# Altium PCB PCB.PcbDoc
Units mm, origin at the board's own origin, x right, y up, seen from the top; angles counter-clockwise.
Board outline 113.2 x 113.2 mm, 4 copper layers (Top Layer, Mid-Layer 1, Mid-Layer 2, Bottom Layer), stack 1.545 mm thick; 17 components, 5 nets, 450 pads, 0 vias.
Unrouted connection lines stored in the file: 39.
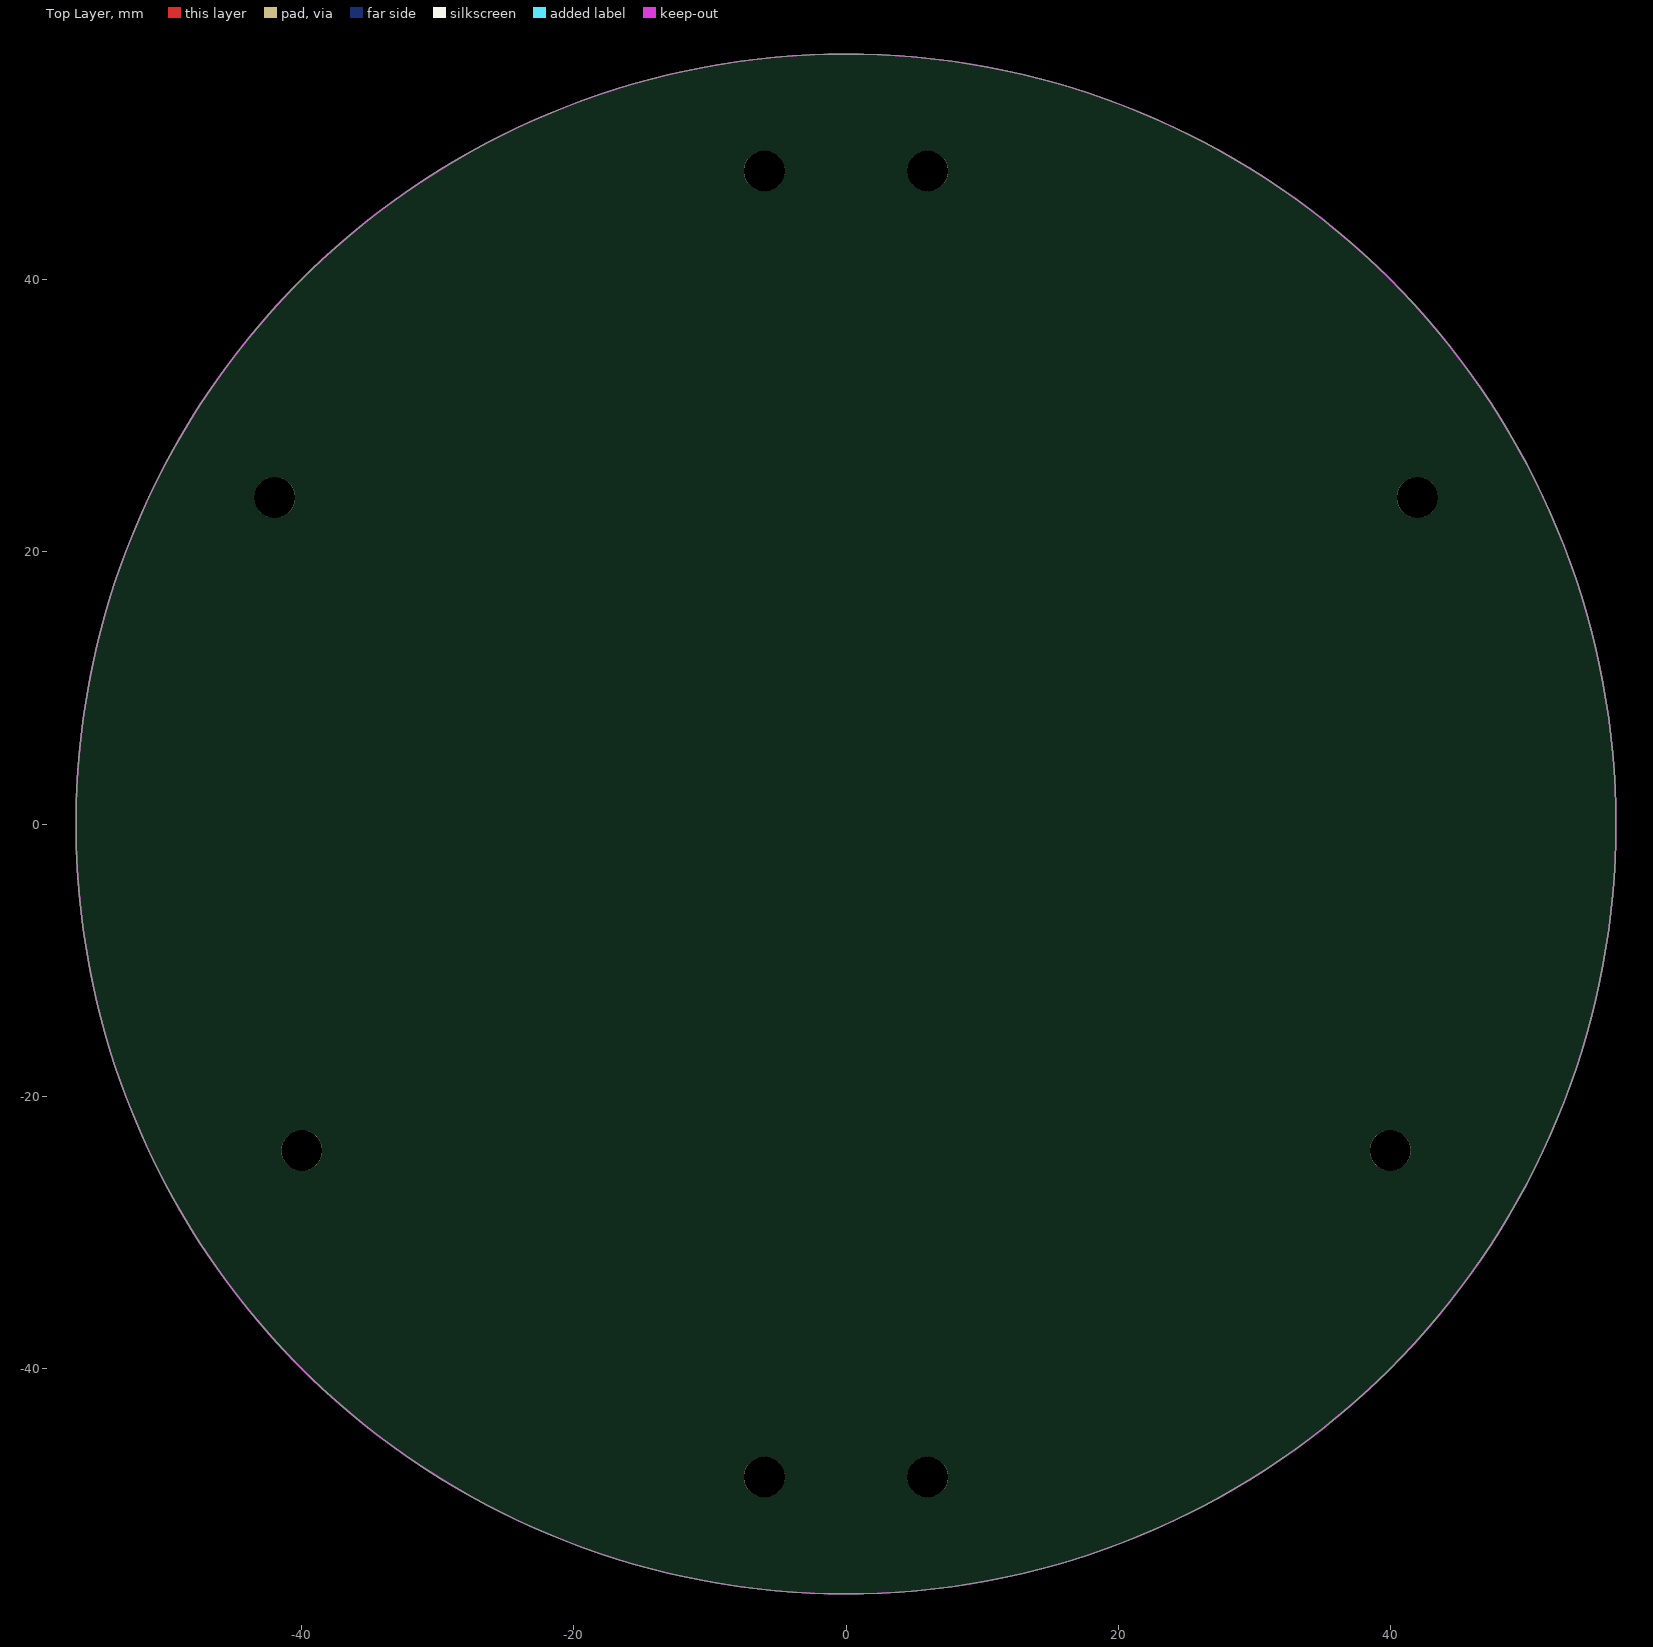
[diagram p0: Top Layer view]
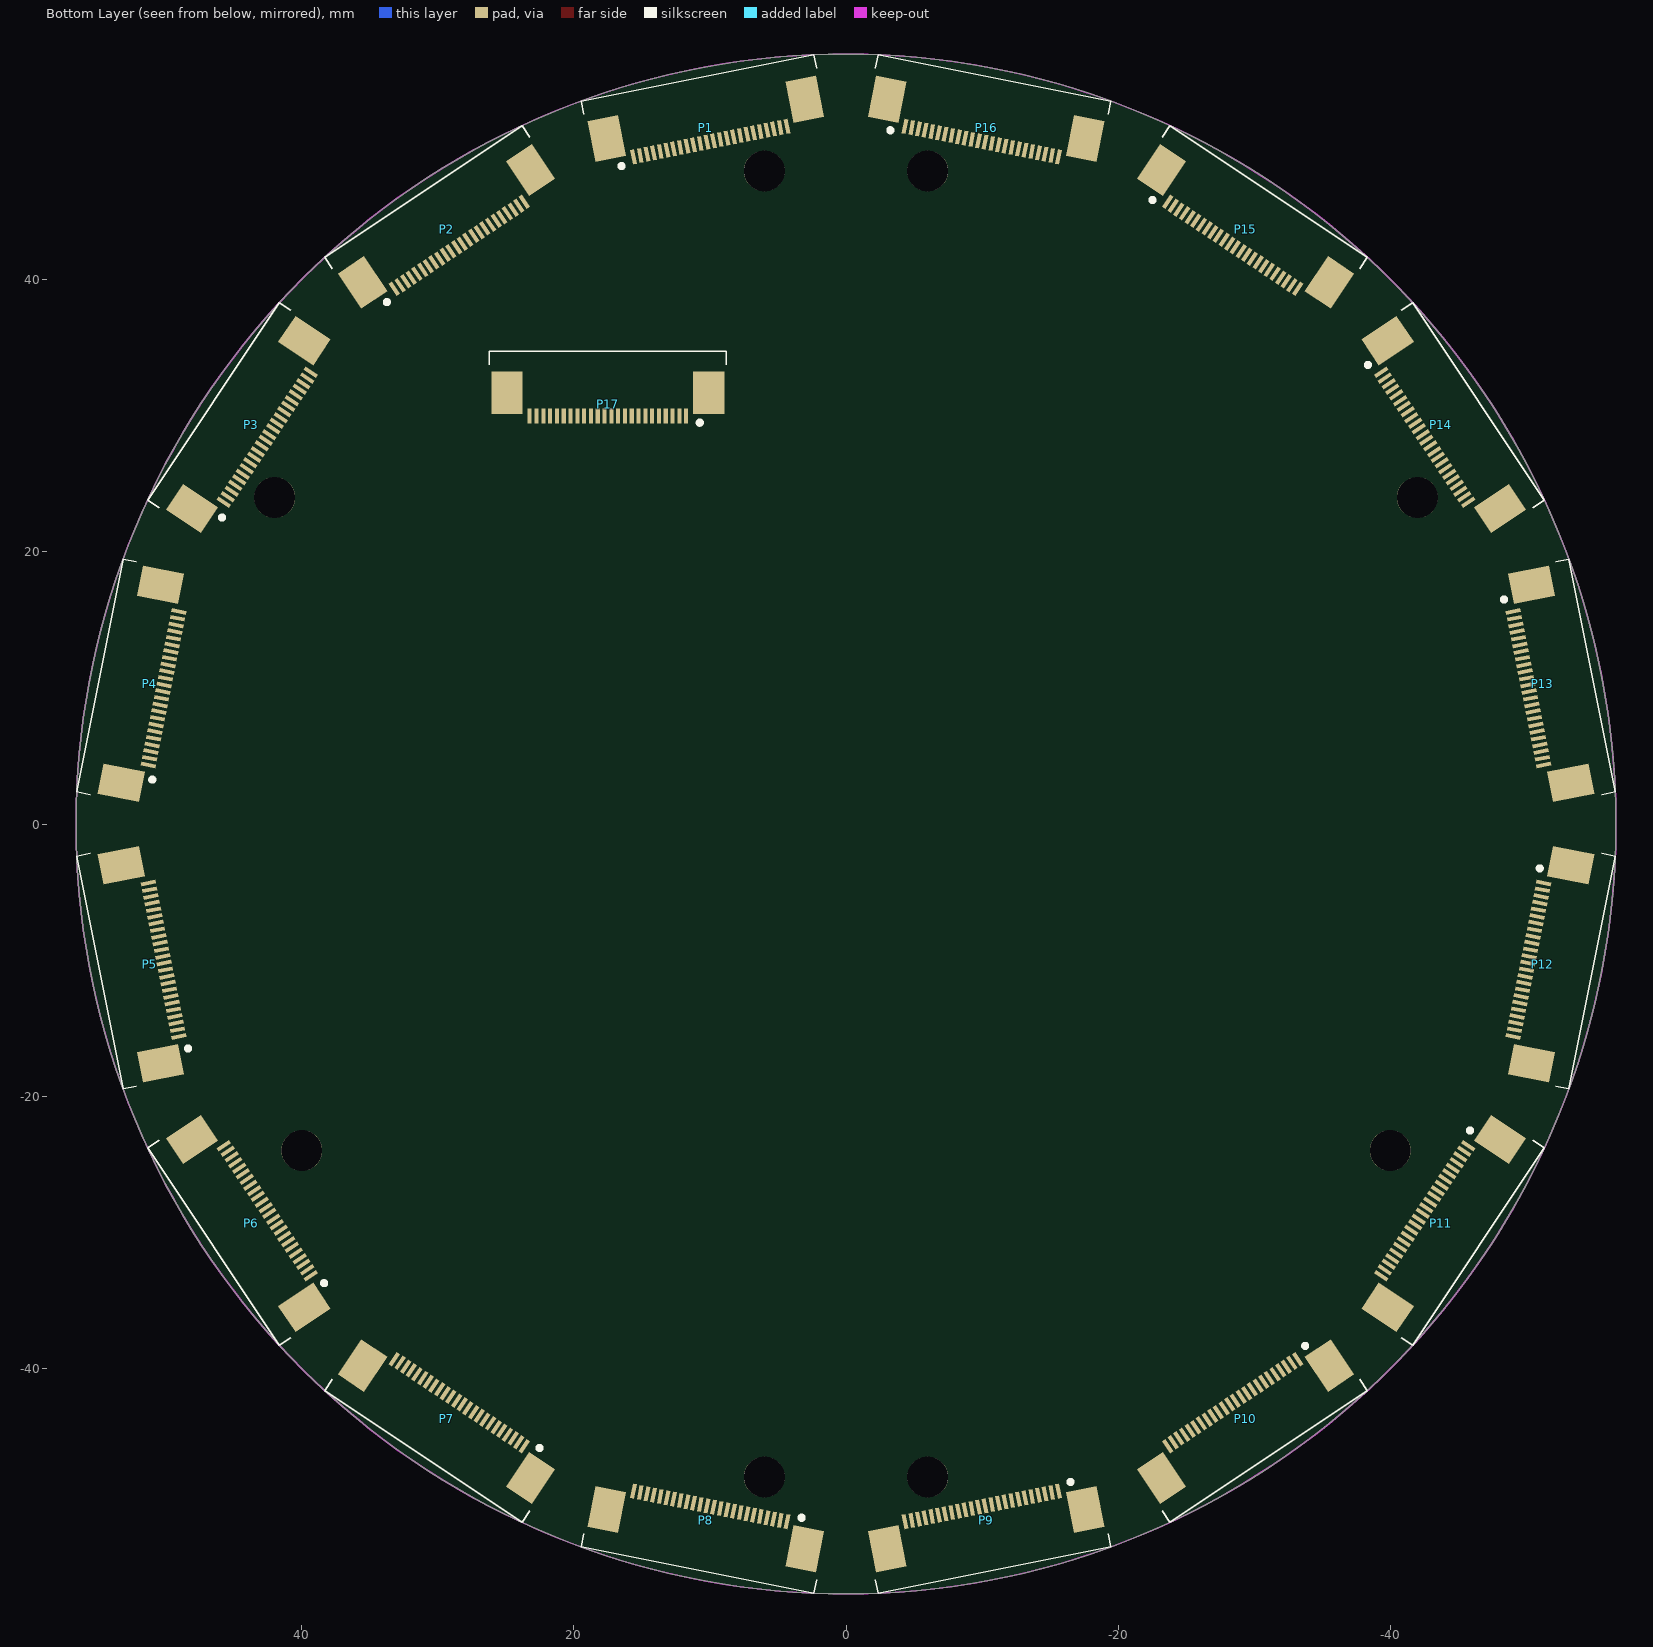
[diagram p1: Bottom Layer view, seen from below]

## Layer stack, top to bottom
Top Solder: solder mask 0.016, Solder Resist, Dk 3.5
Top Layer: signal copper 0.035
Dielectric1: prepreg 0.12, FR-4, Dk 4.5
Mid-Layer 1: signal copper 0.0175
Dielectric2: core 1.2, FR-4, Dk 4.6
Mid-Layer 2: signal copper 0.0175
Dielectric3: prepreg 0.12, FR-4, Dk 4.5
Bottom Layer: signal copper 0.035
Bottom Solder: solder mask 0.016, Solder Resist, Dk 3.5

## Board outline
-56.6,0 ccw(c0,0) 0,-56.6 ccw(c0,0) 56.6,0 ccw(c0,0) 0,56.6 ccw(c0,0)

## Design rules (kind name [scope] priority, off if disabled: settings)
Clearance [All] p1: gap=0.2
PolygonConnect [All] p1: connectstyle=Relief reliefconductorwidth=0.254 reliefentries=4 polygonreliefangle="90 Angle" airgapwidth=0.254
RoutingVias [All] p1: holewidth=0.711 width=1.27 viastyle="Through Hole" minholewidth=0.711 minwidth=1.27 maxholewidth=0.711 maxwidth=1.27
SolderMaskExpansion [All] p1: expansion=0.102
Width [All] p1: maxlimit=0.254 minlimit=0.254 preferedwidth=0.254
30 further rules are at their usual default settings.

## Classes and differential pairs
component class "Top Level": P17
component class "Camera 15-16": P15 P16
component class "Camera 13-14": P13 P14
component class "Camera 11-12": P11 P12
component class "Camera 9-10": P9 P10
component class "Camera 7-8": P7 P8
component class "Camera 5-6": P5 P6
component class "Camera 3-4": P3 P4
component class "Camera 1-2": P1 P2

## Components (designator, comment, footprint, x,y, rotation, side; value= is the part's Value field where it differs from the comment)
P1 "OV-Header24" 2-1734592-4_REVERSED 10.145,51.001 r348.75 bottom
P2 "OV-Header24" 2-1734592-4_REVERSED 28.89,43.236 r326.25 bottom locked
P3 "OV-Header24" 2-1734592-4_REVERSED 43.236,28.89 r303.75 bottom locked
P4 "OV-Header24" 2-1734592-4_REVERSED 51.001,10.145 r281.25 bottom locked
P5 "OV-Header24" 2-1734592-4_REVERSED 51.001,-10.145 r258.75 bottom locked
P6 "OV-Header24" 2-1734592-4_REVERSED 43.236,-28.89 r236.25 bottom locked
P7 "OV-Header24" 2-1734592-4_REVERSED 28.89,-43.236 r213.75 bottom locked
P8 "OV-Header24" 2-1734592-4_REVERSED 10.145,-51.001 r191.25 bottom locked
P9 "OV-Header24" 2-1734592-4_REVERSED -10.145,-51.001 r168.75 bottom locked
P10 "OV-Header24" 2-1734592-4_REVERSED -28.89,-43.236 r146.25 bottom locked
P11 "OV-Header24" 2-1734592-4_REVERSED -43.236,-28.89 r123.75 bottom locked
P12 "OV-Header24" 2-1734592-4_REVERSED -51.001,-10.145 r101.25 bottom locked
P13 "OV-Header24" 2-1734592-4_REVERSED -51.001,10.145 r78.75 bottom locked
P14 "OV-Header24" 2-1734592-4_REVERSED -43.236,28.89 r56.25 bottom locked
P15 "OV-Header24" 2-1734592-4_REVERSED -28.89,43.236 r33.75 bottom locked
P16 "OV-Header24" 2-1734592-4_REVERSED -10.145,51.001 r11.25 bottom locked
P17 "Header 24" 2-1734592-4 11.75,30 r0 bottom locked

## Footprints (in the part's own frame and the unit in brackets; to place one, negate y for a bottom-side part, rotate by r counter-clockwise, add the part's x,y. Pads: shape width x height; smd on the part's side, far side on the other; paste and mask are expansions set on the pad)
2-1734592-4 [mm]
  rect 2.3x3.1 smd: 0(-1.67,-1.7) 0(13.17,-1.7)
  rect 0.3x1.1 smd: 1(0,0) 2(0.5,0) 3(1,0) 4(1.5,0) 5(2,0) 6(2.5,0) 7(3,0) 8(3.5,0) 9(4,0) 10(4.5,0) 11(5,0) 12(5.5,0) 13(6,0) 14(6.5,0) 15(7,0) 16(7.5,0) 17(8,0) 18(8.5,0) 19(9,0) 20(9.5,0) 21(10,0) 22(10.5,0) 23(11,0) 24(11.5,0)
  silkscreen extent -2.97,-4.76 14.46,0.65, body extent -2.97,-4.76 14.46,0.35, height 2.06
2-1734592-4_REVERSED [mm]
  rect 2.3x3.1 smd: 0(-7.42,-0.85) 0(7.42,-0.85)
  rect 0.3x1.1 smd: 1(5.75,0.85) 2(5.25,0.85) 3(4.75,0.85) 4(4.25,0.85) 5(3.75,0.85) 6(3.25,0.85) 7(2.75,0.85) 8(2.25,0.85) 9(1.75,0.85) 10(1.25,0.85) 11(0.75,0.85) 12(0.25,0.85) 13(-0.25,0.85) 14(-0.75,0.85) 15(-1.25,0.85) 16(-1.75,0.85) 17(-2.25,0.85) 18(-2.75,0.85) 19(-3.25,0.85) 20(-3.75,0.85) 21(-4.25,0.85) 22(-4.75,0.85) 23(-5.25,0.85) 24(-5.75,0.85)
  silkscreen extent -8.72,-3.91 8.71,1.5, body extent -8.72,-3.91 8.71,1.2, height 2.06

## Part data
P1 P2 P3 P4 P5 P6 P7 P8 P9 P10 P11 P12 P13 P14 P15 P16: "TE CONNECTIVITY - 2-1734592-4 - CONN FPC BOTTOM 24POS 0.50MM R/A"
P17: "GLOBAL CONNECTOR TECHNOLOGY - FFC2B10-24-T - FFC/FPC CONNECTOR, RECEPTACLE, 24POS, 1ROW"

## Free pads (board coordinates)
  round 3 hole 3: 0(-42,24) 0(-40,-24) 0(-6,-48) 0(-6,48) 0(6,-48) 0(6,48) 0(40,-24) 0(42,24)

## Nets (pads, with @x,y where several pads share a name; then routed paths per layer and width w, separated by ;. In a path a pad name is that pad's centre, name@x,y a point inside that pad or via, vN(x,y) a via of type N, cw(c..) or ccw(c..) an arc to the next point about the centre after c; other vN are vias at no path point)
3.3V: P17.22
5V: P17.23
12V: P17.5
GND: P17.1 P17.2 P17.24
VBAT: P17.3 P17.4
pads on no net: P1.0 P1.1 P1.2 P1.3 P1.4 P1.5 P1.6 P1.7 P1.8 P1.9 P1.10 P1.11 P1.12 P1.13 P1.14 P1.15 P1.16 P1.17 P1.18 P1.19 P1.20 P1.21 P1.22 P1.23 P1.24 P2.0 P2.1 P2.2 P2.3 P2.4 P2.5 P2.6 P2.7 P2.8 P2.9 P2.10 P2.11 P2.12 P2.13 P2.14 P2.15 P2.16 P2.17 P2.18 P2.19 P2.20 P2.21 P2.22 P2.23 P2.24 P3.0 P3.1 P3.2 P3.3 P3.4 P3.5 P3.6 P3.7 P3.8 P3.9 P3.10 P3.11 P3.12 P3.13 P3.14 P3.15 P3.16 P3.17 P3.18 P3.19 P3.20 P3.21 P3.22 P3.23 P3.24 P4.0 P4.1 P4.2 P4.3 P4.4 P4.5 P4.6 P4.7 P4.8 P4.9 P4.10 P4.11 P4.12 P4.13 P4.14 P4.15 P4.16 P4.17 P4.18 P4.19 P4.20 P4.21 P4.22 P4.23 P4.24 P5.0 P5.1 P5.2 P5.3 P5.4 P5.5 P5.6 P5.7 P5.8 P5.9 P5.10 P5.11 P5.12 P5.13 P5.14 P5.15 P5.16 P5.17 P5.18 P5.19 P5.20 P5.21 P5.22 P5.23 P5.24 P6.0 P6.1 P6.2 P6.3 P6.4 P6.5 P6.6 P6.7 P6.8 P6.9 P6.10 P6.11 P6.12 P6.13 P6.14 P6.15 P6.16 P6.17 P6.18 P6.19 P6.20 P6.21 P6.22 P6.23 P6.24 P7.0 P7.1 P7.2 P7.3 P7.4 P7.5 P7.6 P7.7 P7.8 P7.9 P7.10 P7.11 P7.12 P7.13 P7.14 P7.15 P7.16 P7.17 P7.18 P7.19 P7.20 P7.21 P7.22 P7.23 P7.24 P8.0 P8.1 P8.2 P8.3 P8.4 P8.5 P8.6 P8.7 P8.8 P8.9 P8.10 P8.11 P8.12 P8.13 P8.14 P8.15 P8.16 P8.17 P8.18 P8.19 P8.20 P8.21 P8.22 P8.23 P8.24 P9.0 P9.1 P9.2 P9.3 P9.4 P9.5 P9.6 P9.7 P9.8 P9.9 P9.10 P9.11 P9.12 P9.13 P9.14 P9.15 P9.16 P9.17 P9.18 P9.19 P9.20 P9.21 P9.22 P9.23 P9.24 P10.0 P10.1 P10.2 P10.3 P10.4 P10.5 P10.6 P10.7 P10.8 P10.9 P10.10 P10.11 P10.12 P10.13 P10.14 P10.15 P10.16 P10.17 P10.18 P10.19 P10.20 P10.21 P10.22 P10.23 P10.24 P11.0 P11.1 P11.2 P11.3 P11.4 P11.5 P11.6 P11.7 P11.8 P11.9 P11.10 P11.11 P11.12 P11.13 P11.14 P11.15 P11.16 P11.17 P11.18 P11.19 P11.20 P11.21 P11.22 P11.23 P11.24 P12.0 P12.1 P12.2 P12.3 P12.4 P12.5 P12.6 P12.7 P12.8 P12.9 P12.10 P12.11 P12.12 P12.13 P12.14 P12.15 P12.16 P12.17 P12.18 P12.19 P12.20 P12.21 P12.22 P12.23 P12.24 P13.0 P13.1 P13.2 P13.3 P13.4 P13.5 P13.6 P13.7 P13.8 P13.9 P13.10 P13.11 P13.12 P13.13 P13.14 P13.15 P13.16 P13.17 P13.18 P13.19 P13.20 P13.21 P13.22 P13.23 P13.24 P14.0 P14.1 P14.2 P14.3 P14.4 P14.5 P14.6 P14.7 P14.8 P14.9 P14.10 P14.11 P14.12 P14.13 P14.14 P14.15 P14.16 P14.17 P14.18 P14.19 P14.20 P14.21 P14.22 P14.23 P14.24 P15.0 P15.1 P15.2 P15.3 P15.4 P15.5 P15.6 P15.7 P15.8 P15.9 P15.10 P15.11 P15.12 P15.13 P15.14 P15.15 P15.16 P15.17 P15.18 P15.19 P15.20 P15.21 P15.22 P15.23 P15.24 P16.0 P16.1 P16.2 P16.3 P16.4 P16.5 P16.6 P16.7 P16.8 P16.9 P16.10 P16.11 P16.12 P16.13 P16.14 P16.15 P16.16 P16.17 P16.18 P16.19 P16.20 P16.21 P16.22 P16.23 P16.24 P17.0 P17.6 P17.7 P17.8 P17.9 P17.10 P17.11 P17.12 P17.13 P17.14 P17.15 P17.16 P17.17 P17.18 P17.19 P17.20 P17.21

## Keep-outs
Keep-Out Layer:
  circle w0.1: c0,0 r56.6